# Altium PCB ArgoFCRev2.PcbDoc (part 5 of 6)
Units mm, origin at the board's own origin, x right, y up, seen from the top; angles counter-clockwise.
Board outline 140.21 x 119.63 mm, 4 copper layers (Top Layer, GND Plane, PWR Plane, Bottom Layer), stack 0.603 mm thick; 413 components, 223 nets, 1421 pads, 793 vias.
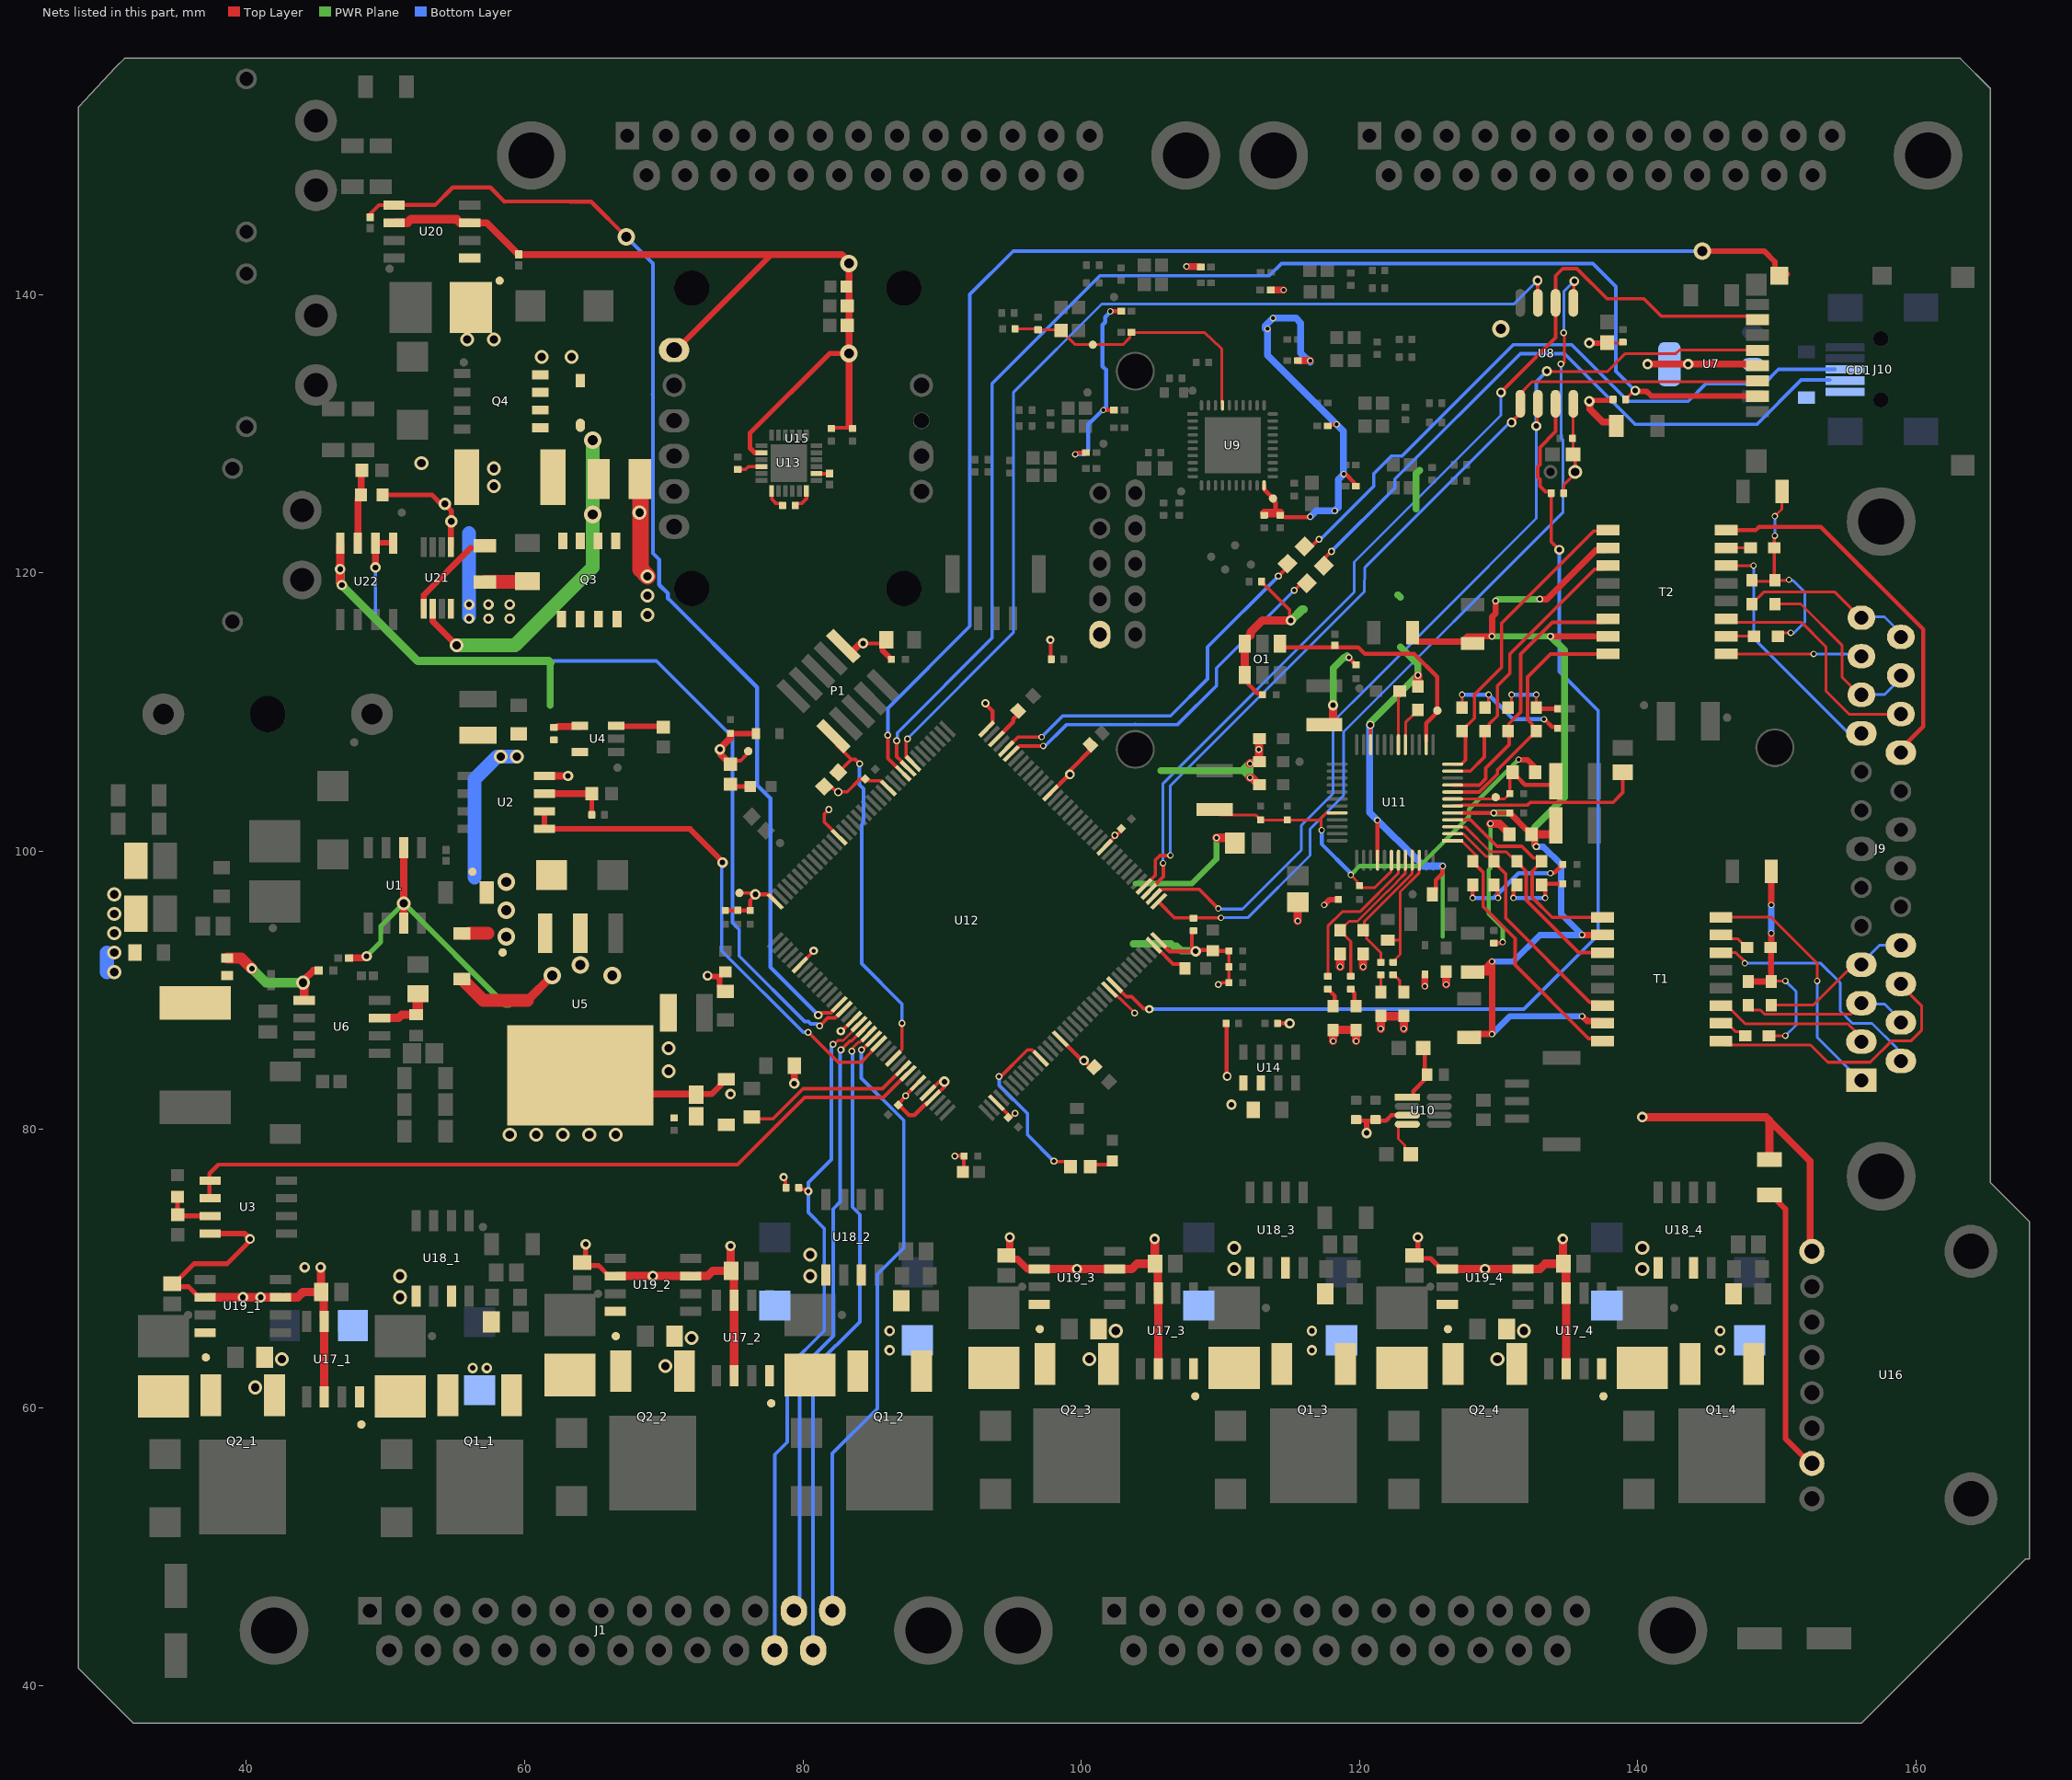
[diagram p6: the nets of this part, all layers, seen from the top]

## Via types
v1: diameter 0.5, hole 0.3, Top Layer to Bottom Layer, 278 vias
v2: diameter 0.45, hole 0.3, Top Layer to Bottom Layer, 146 vias
v3: diameter 0.75, hole 0.4, Top Layer to Bottom Layer, 103 vias
v4: diameter 1.27, hole 0.711, Top Layer to Bottom Layer, 101 vias
v5: diameter 1, hole 0.6, Top Layer to Bottom Layer, 86 vias
v6: diameter 0.6, hole 0.3, Top Layer to Bottom Layer, 31 vias
v7: diameter 0.7, hole 0.4, Top Layer to Bottom Layer, 19 vias
v8: diameter 0.6, hole 0.35, Top Layer to Bottom Layer, 8 vias
v9: diameter 0.9, hole 0.5, Top Layer to Bottom Layer, 7 vias
v10: diameter 0.6, hole 0.4, Top Layer to Bottom Layer, 4 vias
v11: diameter 3.3, hole 3.3, Top Layer to Bottom Layer, 4 vias
v12: diameter 0.65, hole 0.4, Top Layer to Bottom Layer, 2 vias
v13: diameter 0.75, hole 0.45, Top Layer to Bottom Layer, 1 vias
v14: diameter 1.2, hole 0.7, Top Layer to Bottom Layer, 1 vias
v15: diameter 1, hole 0.711, Top Layer to Bottom Layer, 1 vias
v16: diameter 3.2, hole 3.2, Top Layer to Bottom Layer, 1 vias

## Nets (pads, with @x,y where several pads share a name; then routed paths per layer and width w, separated by ;. In a path a pad name is that pad's centre, name@x,y a point inside that pad or via, vN(x,y) a via of type N, cw(c..) or ccw(c..) an arc to the next point about the centre after c; other vN are vias at no path point) (continued)
NetC68_1: C68.1 C69.1 R40.2 R46.2 TP19.1 U9.37 | length 20.1
  Top Layer w0.2: R46.2@95.261,137.541 96.832,137.541 C68.1@96.901,137.472 98.504,137.472 99.578,136.398 TP19.1@100.838,136.398 102.997,136.398 103.486,136.887 103.486,137.151 103.553,137.217 R40.2@103.703,137.217 ; R40.2@103.759,137.287 108.853,137.287 110.048,136.156 110.05,136.154 110.109,136.095 U9.37@110.109,132.207
NetC72_1: C72.1 R47.1 U10.1 | length 4.1
  Top Layer w0.2: U10.1@123.444,82.326 123.727,82.326 U10.1@123.874,82.473 ; R47.1@124.333,85.598 124.543,85.598 R47.1@124.714,85.427 ; C72.1@124.686,83.894 C72.1@124.841,84.048
  Top Layer w0.3: U10.1@123.874,82.473 123.874,82.756 124.686,83.568 C72.1@124.686,83.894 ; C72.1@124.714,84.201 R47.1@124.714,85.427
NetC76_1: C76.1 C77.2 FB2.1 TP20.1 U11.7 | length 8.7
  Top Layer w0.2: U11.7@126.96,103.755 129.54,103.755 130.175,103.755 130.433,103.755 C76.1@130.683,104.005 ; FB2.1@130.818,105.456 FB2.1@131.026,105.664
  Top Layer w0.25: C76.1@130.818,104.14 FB2.1@130.818,105.456
  Top Layer w0.3: FB2.1@131.026,105.664 131.026,105.614 131.326,105.314 131.376,105.314 131.915,104.775 C77.2@133.858,104.775
NetC81_1: C81.1 C82.1 C83.1 C84.1 FB2.2 U11.32 U11.42 | length 35.9
  Top Layer w0.2: C81.1@109.981,102.616 112.53,102.616 C82.1@112.903,102.243 ; C82.1@112.911,102.243 C84.1@114.808,102.243 ; C84.1@114.81,102.241 117.117,102.241 ; 117.234,102.108 117.234,102.3 ; v2(117.282,101.51) 117.234,101.558 117.234,102.124 117.117,102.241 ; U11.32@118.404,102.755 118.396,102.747 117.623,102.747 117.117,102.241 ; v2(119.38,98.298) 119.865,97.813 119.865,97.678 120.151,97.392 121.121,97.392 122.284,98.554 122.284,98.687 122.305,98.709 U11.42@122.305,99.354 ; FB2.2@132.334,105.918 FB2.2@132.442,105.918
  Top Layer w0.4: v2(131.445,106.589) 131.455,106.579 132.073,106.579 FB2.2@132.588,106.064
  PWR Plane w0.3: v2(117.282,101.51) v2@117.322,101.51 ; v2@119.351,98.327 v2(119.38,98.298) ; v2@119.444,98.361 120.015,98.933 124.333,98.933 127.875,102.475 127.875,103.019 v2(131.445,106.589)
  Bottom Layer w0.3: v2(117.282,101.51) 117.282,100.523 119.351,98.454 119.351,98.367 119.429,98.29 v2@119.449,98.29 ; v2(119.38,98.298) v2@119.444,98.361
NetC91_1: C91.1 R55.2 R58.2 | length 5.6
  Top Layer w0.2: R58.2@131.07,97.327 R58.2@131.318,97.575 ; R55.2@132.969,97.282 133.293,97.282 R55.2@133.35,97.225
  Top Layer w0.3: v2(131.07,96.647) R58.2@131.07,97.327 ; R55.2@133.223,97.663 C91.1@134.493,97.663 ; v2(133.35,96.647) R55.2@133.35,97.225
  Bottom Layer w0.3: v2(131.07,96.647) v2(133.35,96.647)
NetC92_1: C92.1 R56.2 R57.2 | length 9.6
  Top Layer w0.3: v2(128.143,96.647) R57.2@128.143,97.575 ; R56.2@129.667,97.409 129.783,97.409 129.917,97.275 129.917,96.734 129.963,96.688 v2(129.963,96.647) ; v2(133.731,98.425) 133.76,98.454 134.022,98.454 134.62,99.052 C92.1@134.62,99.06
  Bottom Layer w0.3: v2(128.143,96.647) 129.667,96.647 v2@129.828,96.808 ; v2(129.963,96.647) 129.963,96.672 v2@129.828,96.808 ; v2(133.731,98.425) 131.445,98.425 v2@129.828,96.808
NetC94_1: C94.1 R63.2 R66.2 R67.2 R68.2 | length 15.6
  Top Layer w0.2: R63.2@149.606,86.741 v2(150.622,86.741) ; R68.2@149.606,90.678 v2(150.622,90.678)
  Top Layer w0.45: R67.2@148.082,90.678 148.121,90.639 R68.2@149.606,90.639 ; R66.2@149.567,93.091 149.587,93.072 149.587,90.824 R68.2@149.606,90.805 ; R66.2@149.606,93.091 v2(149.606,94.107) ; v2(149.606,96.139) C94.1@149.606,98.298
  Bottom Layer w0.2: v2(150.622,86.741) 151.384,87.503 151.384,89.916 v2(150.622,90.678)
  Bottom Layer w0.45: v2(149.606,94.107) v2(149.606,96.139)
NetC95_1: C95.1 R71.2 R72.2 | length 9.4
  Top Layer w0.2: R71.2@127.381,110.324 v2(127.381,111.252) ; R72.2@129.286,110.617 v2(129.286,111.252)
  Top Layer w0.3: v2(133.271,109.479) 133.312,109.479 133.852,108.939 134.147,108.939 C95.1@134.247,108.839
  Bottom Layer w0.3: v2(127.381,111.252) v2(129.286,111.252) 131.059,109.479 v2(133.271,109.479)
NetC96_1: C96.1 R69.2 R70.2 | length 4.9
  Top Layer w0.2: R69.2@130.683,110.324 130.937,110.578 v2(130.937,111.252) ; R70.2@132.715,110.617 v2(132.715,111.252) ; R70.2@132.842,110.324 R70.2@132.93,110.236
  Top Layer w0.3: R70.2@132.93,110.236 C96.1@134.239,110.236
  Bottom Layer w0.3: v2(130.937,111.252) v2(132.715,111.252)
NetC97_1: C97.1 R78.2 R79.2 R80.2 R82.2 | length 14.7
  Top Layer w0.2: R82.2@148.209,119.468 148.297,119.38 R80.2@149.86,119.38 ; R80.2@149.86,119.468 150.837,119.468 v2(150.876,119.507) ; R80.2@149.86,119.634 149.821,119.673 149.821,122.626 v2(149.86,122.665) ; v2(149.86,124.079) 150.368,124.587 C97.1@150.368,125.653 ; R78.2@150.368,115.697 v2(151.003,115.697)
  Bottom Layer w0.2: v2(149.86,122.665) v2(149.86,124.079) ; v2(150.876,119.507) 150.92,119.463 151.174,119.463 152.019,118.618 152.019,116.459 151.213,115.653 151.047,115.653 v2(151.003,115.697)
NetC99_1: C99.1 O1.4 TP24.1 U11.14 | length 17.1
  Top Layer w0.3: O1.4@114.3,114.663 118.237,114.663 119.906,114.663 120.396,114.173 123.952,114.173 125.603,112.522 TP24.1@125.603,110.109 125.603,109.982 124.805,109.184 U11.14@124.805,107.91
NetC117_1: C117.1 U13.10 | length 1.8
  Top Layer w0.254: C117.1@75.311,127.439 75.877,127.439 76.077,127.639 U13.10@77.019,127.639
NetC118_1: C118.1 U12.71 | length 2.7
  Top Layer w0.254: U12.71@105.537,92.964 106.611,91.89 107.181,91.89 107.569,91.502 C118.1@107.569,91.44
NetC119_1: C119.1 U13.18 | length 1.3
  Top Layer w0.254: C119.1@79.444,124.841 79.444,124.866 79.567,124.989 79.904,124.989 80.264,125.349 U13.18@80.264,125.603
NetC119_2: C119.2 U13.13 | length 1.3
  Top Layer w0.254: U13.13@77.763,125.603 77.763,125.31 78.084,124.989 78.421,124.989 78.486,124.924 C119.2@78.486,124.841
NetC120_1: C120.1 U12.106 | length 2.7
  Top Layer w0.3: U12.106@93.913,108.073 95.123,109.283 95.123,109.492 95.482,109.85 C120.1@95.482,110.087
NetC121_2: C121.2 U13.20 | length 0.8
  Top Layer w0.254: U13.20@81.153,127.127 C121.2@81.915,127.127
NetC131_2: C131.2 U12.14 U20.5 | length 84.4
  Top Layer w0.25: v8(81.103,88.224) 81.197,88.224 81.366,88.392
  Top Layer w0.254: C131.2@48.895,145.551 C131.2@48.895,145.796
  Top Layer w0.28: C131.2@48.895,145.796 49.53,146.431 U20.5@50.628,146.431 ; 58.547,146.685 63.273,146.685 ; 81.366,88.392 82.01,88.392 U12.14@82.616,88.998
  Top Layer w0.3: U20.5@50.628,146.431 53.556,146.431 54.826,147.701 57.531,147.701 58.547,146.685 ; 63.273,146.685 64.77,146.685 v4(67.31,144.145)
  Bottom Layer w0.28: v4(67.31,144.145) 69.215,142.24 69.215,132.842 69.215,121.412 69.674,120.953 69.674,119.143
  Bottom Layer w0.3: 69.674,119.143 70.309,118.508 70.309,118.168 76.708,111.769 76.708,104.749 77.662,103.795 77.662,91.664 v8(81.103,88.224)
NetC133_1: C133.1 R108.1 | length 3
  Top Layer w1: R108.1@57.15,119.349 C133.1@60.146,119.349
NetD9_2: D9.2 R85.1 | length 1.4
  Top Layer w0.35: R85.1@74.549,104.648 D9.2@75.946,104.648
NetD10_2: D10.2 R93.2 | length 1.4
  Top Layer w0.254: R93.2@100.965,77.47 D10.2@102.362,77.47
NetD13_1: D13.1 Q4.4 R107.1 R108.2 U21.1 | length 5.8
  Top Layer w0.45: U21.1@52.746,117.422 52.746,118.405 56.134,121.793
  other v5: 57.785,126.238 57.785,127.508 61.214,135.509 63.373,135.509
NetD13_1_1: D13_1.1 Q1_1.1 R103_1.2 U18_1.7
  other v3: 56.261,62.865 57.277,62.865
NetD13_2: D13.2 Q3.1 Q3.2 Q3.3 Q4.1 Q4.2 Q4.3 R106.2 TP29.1 U21.2 | length 24.4
  Top Layer w0.45: U21.2@53.396,117.422 53.396,116.53 v5(55.118,114.808)
  PWR Plane w1: v5(55.118,114.808) 59.309,114.808 64.897,120.396 v4(64.897,124.206) v4@64.897,129.413
  other v4: 64.897,129.54
NetD13_2_1: D13_2.1 Q1_2.1 R103_2.2 U18_2.7
  other v3: 86.233,64.135 86.233,65.532
NetD13_3_1: D13_3.1 Q1_3.1 R103_3.2 U18_3.7
  other v3: 116.586,64.135 116.586,65.532
NetD13_4_1: D13_4.1 Q1_4.1 R103_4.2 U18_4.7
  other v3: 145.923,64.135 145.923,65.532
NetD14_1_1: D14_1.1 Q2_1.1 R105_1.2 U18_1.5
  other v5: 40.64,61.468 42.545,63.5 51.054,67.945 51.054,69.469
NetD14_2_1: D14_2.1 Q2_2.1 R105_2.2 U18_2.5
  other v5: 70.104,62.992 72.009,65.024 80.518,69.469 80.518,70.993
NetD14_3_1: D14_3.1 Q2_3.1 R105_3.2 U18_3.5
  other v5: 100.584,63.5 102.489,65.532 110.998,69.977 110.998,71.501
NetD14_4_1: D14_4.1 Q2_4.1 R105_4.2 U18_4.5
  other v5: 129.921,63.5 131.826,65.532 140.335,69.977 140.335,71.501
NetENC1_RST: 
NetJ9_1: J9.1 T1.16 | length 18.1
  Top Layer w0.2: T1.16@145.987,95.25 149.606,95.25 152.908,91.948 v2(152.908,90.678)
  Bottom Layer w0.2: v2(152.908,90.678) 152.908,86.614 J9.1@156.083,83.439
NetJ9_2: J9.2 T1.11 | length 11.4
  Top Layer w0.2: T1.11@145.987,88.9 146.432,88.9 147.743,87.589 155.108,87.589 J9.2@156.341,86.356
NetJ9_3: J9.3 J9.15 R67.1 | length 12.7
  Top Layer w0.2: R67.1@147.955,88.939 147.955,88.889 148.255,88.589 148.823,88.589 149.123,88.289 155.345,88.289 J9.3@156.45,89.394
  Bottom Layer w0.2: J9.3@156.083,89.027 157.734,89.027 J9.15@159.004,87.757
NetJ9_4: J9.4 J9.17 R68.1 | length 10.7
  Top Layer w0.2: R68.1@149.606,88.939 152.61,88.939 J9.4@155.521,91.85
  Bottom Layer w0.2: J9.4@155.92,91.785 157.37,93.235 J9.17@158.877,93.235
NetJ9_10: J9.10 T2.14 | length 17.8
  Top Layer w0.2: T2.14@146.368,120.523 v2(148.336,120.523)
  Bottom Layer w0.2: v2(148.336,120.523) 148.336,115.316 155.147,108.505 156.045,108.505 J9.10@156.08,108.47
NetJ9_11: J9.11 J9.24 R80.1 | length 14.2
  Top Layer w0.2: R80.1@149.86,117.768 151.726,117.768 154.686,114.808 154.686,112.522 J9.11@155.956,111.252
  Bottom Layer w0.2: J9.11@155.833,111.252 157.734,111.252 J9.24@159.281,112.799
NetJ9_12: J9.12 T2.9 | length 9.7
  Top Layer w0.2: T2.9@146.368,114.173 v2(152.654,114.173)
  Bottom Layer w0.2: v2(152.654,114.173) J9.12@156.083,114.173
NetJ9_13: J9.13 J9.25 R82.1 | length 13.6
  Top Layer w0.2: R82.1@148.209,117.768 149.059,118.618 154.178,118.618 J9.13@156.191,116.605
  Bottom Layer w0.2: J9.13@155.581,116.84 157.734,116.84 J9.25@159.348,115.226
NetJ9_14: J9.14 T1.14 | length 17.8
  Top Layer w0.2: T1.14@145.987,92.71 147.066,92.71 147.701,92.075 v2(147.701,91.948)
  Bottom Layer w0.2: v2(147.701,91.948) 153.162,91.948 154.559,90.551 154.559,88.519 155.448,87.63 156.845,87.63 158.623,85.852 158.623,85.222 J9.14@158.92,84.925
NetJ9_16: J9.16 T1.9 | length 19.9
  Top Layer w0.2: T1.9@145.987,86.36 146.267,86.08 152.429,86.08 153.673,84.836 156.718,84.836 158.242,86.36 159.639,86.36 160.401,87.122 160.401,88.9 J9.16@158.877,90.424
NetJ9_22: J9.22 T2.16 | length 27.2
  Top Layer w0.3: T2.16@146.368,123.063 148.482,123.063 148.736,123.317 153.162,123.317 160.528,115.951 160.528,108.966 159.131,107.569 J9.22@159.131,106.68
NetJ9_23: J9.23 T2.11 | length 17.2
  Top Layer w0.2: T2.11@146.368,116.713 146.622,116.459 151.765,116.459 153.543,114.681 153.543,111.506 155.194,109.855 J9.23@158.877,109.855
NetJ10_2: J10.2 R95.1 | length 46.9
  Top Layer w0.254: R95.1@116.967,120.523 v1(117.983,121.539)
  Bottom Layer w0.254: v1(117.983,121.539) 122.555,126.111 122.555,126.746 131.572,135.763 134.747,135.763 139.827,130.683 148.59,130.683 151.765,133.858 J10.2@153.797,133.858
NetJ10_3: J10.3 R96.1 | length 47.5
  Top Layer w0.254: R96.1@116.078,121.412 v1(117.094,122.428)
  Bottom Layer w0.254: v1(117.094,122.428) 117.161,122.428 117.284,122.551 117.344,122.551 121.031,126.238 121.031,127.127 122.301,128.397 123.063,128.397 131.064,136.398 135.255,136.398 139.319,132.334 143.637,132.334 144.907,133.604 149.098,133.604 150.114,134.62 J10.3@154.178,134.62
NetLED1_1: LED1.1 R74.2 U11.44 | length 11
  Top Layer w0.2: R74.2@118.618,94.272 119.38,93.51 LED1.1@119.38,91.059 ; R74.2@118.618,94.322 118.618,94.372 118.918,94.672 118.968,94.672 119.268,94.972 119.864,94.972 122.009,97.117 122.036,97.117 122.695,97.776 122.695,97.803 123.305,98.413 U11.44@123.305,99.354
  Top Layer w0.3: LED1.1@119.38,90.985 LED1.1@119.458,90.985
NetLED1_2: LED1.2 R77.2 | length 1.4
  Top Layer w0.3: LED1.2@119.38,90.096 119.405,90.096 119.505,89.996 119.505,89.949 119.634,89.82 R77.2@119.634,88.806
NetLED2_1: LED2.1 U11.43 | length 11.2
  Top Layer w0.2: LED2.1@117.729,91.006 117.729,94.615 118.766,95.652 120.036,95.652 122.805,98.421 U11.43@122.805,99.354
NetLED2_2: LED2.2 R81.2 | length 1.4
  Top Layer w0.3: LED2.2@117.729,90.096 117.754,90.096 117.854,89.996 117.854,89.971 118.237,89.588 R81.2@118.237,88.9
NetLED3_1: LED3.1 R75.2 U11.46 | length 8.9
  Top Layer w0.2: R75.2@122.047,93.611 122.924,93.611 ; LED3.1@122.428,92.075 122.506,92.075 122.603,92.172 122.603,92.25 122.936,92.583 122.936,93.611 122.936,97.08 124.276,98.42 U11.46@124.276,99.325
NetLED3_2: LED3.2 R83.2 | length 1.3
  Top Layer w0.2: LED3.2@122.428,91.186 122.428,91.137 122.603,90.962 122.652,90.962 122.89,90.724 122.89,90.216 R83.2@122.936,90.17
NetLED4_1: LED4.1 R76.2 U11.45 | length 9.3
  Top Layer w0.2: LED4.1@121.539,92.075 121.539,92.71 120.535,93.714 120.535,94.056 R76.2@120.269,94.322 120.355,94.408 120.355,94.955 123.805,98.405 U11.45@123.805,99.354
NetLED4_2: LED4.2 R84.2 | length 1.1
  Top Layer w0.2: R84.2@121.539,90.043 LED4.2@121.539,91.112
NetQ3_4: Q3.4 R107.2
NetQ3_5: Q3.5 Q3.6 Q3.7 Q3.8 R106.1 R109.1 R110.2 TP28.1 U20.1 U21.4 U21.5 | length 20.9
  Top Layer w0.35: R110.2@49.911,125.603 53.34,125.603 v9@53.986,124.957 ; v9(54.278,124.968) 54.278,124.919 54.737,124.46 v9(54.737,123.698)
  Top Layer w0.45: U21.5@54.696,121.846 54.696,123.657 v9(54.737,123.698)
  Top Layer w1.2: R106.1@68.278,126.746 68.326,126.698 68.326,120.269 v5(68.834,119.761)
  Bottom Layer w1: v3@56.007,116.84 v3(56.007,117.729) 56.007,122.858
  other v3: 56.007,116.713 57.404,116.713 58.928,116.713 57.404,117.729 58.928,117.729
  other v5: 68.834,116.967 68.834,118.364 68.25,124.333 52.578,127.889 55.88,136.779 57.785,136.779
NetR2_1: R2.1 R5.2 U3.3 | length 2.5
  Top Layer w0.35: R5.2@35.052,73.914 R2.1@35.052,75.057 ; R5.2@35.433,73.787 U3.3@36.83,73.787
NetR3_1: R3.1 R4.2 U2.3 | length 4.5
  Top Layer w0.35: R4.2@64.828,102.87 R3.1@64.828,104.129
  Top Layer w0.5: U2.3@61.414,104.14 R3.1@64.624,104.14
NetR7_2: R7.2 U4.3 | length 3.3
  Top Layer w0.4: U4.3@66.77,108.966 69.85,108.966 R7.2@69.997,108.819
NetR8_1: R8.1 U4.4 | length 2
  Top Layer w0.5: R8.1@62.128,108.908 62.299,108.908 62.357,108.966 63.371,108.966 63.382,108.977 U4.4@64.064,108.977
NetR9_1: R9.1 R12.2 U6.3 | length 4
  Top Layer w0.6: U6.3@49.657,88.011 50.927,88.011 51.169,88.253 R9.1@52.197,88.253
  Top Layer w0.75: R9.1@52.324,88.371 R12.2@52.324,89.754
NetR10_1: R10.1 R13.2 U6.5 | length 9
  Top Layer w0.5: v5@44.069,90.678 44.831,91.44 R13.2@45.085,91.44
  Top Layer w0.6: U6.5@44.151,89.281 v5@44.151,90.758
  Top Layer w0.8: R10.1@38.608,92.323 39.63,92.323 v3(40.386,91.567)
  PWR Plane w0.7: v3(40.386,91.567) 41.402,90.551 v5(44.069,90.551)
NetR48_2: R48.2 U10.4 | length 3.3
  Top Layer w0.2: U10.4@123.444,80.376 122.93,80.376 122.794,80.24 122.794,79.325 123.257,78.862 123.257,78.638 123.663,78.232 R48.2@123.887,78.232
NetR54_1: R54.1 U11.6 | length 13.6
  Top Layer w0.25: U11.6@126.706,103.255 126.71,103.259 127.336,103.259 127.395,103.318 132.09,103.318 132.276,103.504 138.232,103.504 138.938,104.21 R54.1@138.938,105.156
NetR61_2: R61.2 U11.18 | length 3.6
  Top Layer w0.2: U11.18@122.805,107.656 R61.2@122.805,111.299
NetR62_2: R62.2 U11.17 | length 1.7
  Top Layer w0.2: U11.17@123.317,108.331 123.317,109.259 R62.2@123.856,109.798
NetR63_1: R63.1 T1.10 | length 2
  Top Layer w0.2: T1.10@145.987,87.63 146.432,87.63 147.021,87.041 147.528,87.041 R63.1@147.701,86.868
NetR66_1: R66.1 T1.15 | length 1.8
  Top Layer w0.2: T1.15@146.558,93.98 146.558,93.854 146.712,93.7 147.208,93.7 147.817,93.091 R66.1@147.867,93.091
NetR78_1: R78.1 T2.10 | length 1.6
  Top Layer w0.2: T2.10@146.812,115.443 R78.1@148.375,115.443
NetR79_1: R79.1 T2.15 | length 1.7
  Top Layer w0.2: T2.15@146.368,121.793 R79.1@148.082,121.793
NetR93_1: R93.1 U12.48 | length 13
  Top Layer w0.254: v1@94.107,83.693 96.139,85.725 96.446,85.725 97.062,85.109 U12.48@97.095,85.109 ; v1(98.044,77.724) 98.071,77.697 98.893,77.697 99.06,77.53 R93.1@99.06,77.47
  Bottom Layer w0.254: v1(94.107,83.82) 94.107,83.185 96.139,81.153 96.139,79.629 v1(98.044,77.724)
NetR101_2: R101.2 U16.7 | length 20.3
  Top Layer w0.4: R101.2@149.987,75.311 149.987,74.93 150.622,74.295 150.622,57.785 U16.7@152.4,56.007
NetR110_1: R110.1 R111.2 U22.3 | length 5.4
  Top Layer w0.254: R111.2@48.245,127.32 R111.2@48.307,127.381
  Top Layer w0.5: U22.3@48.006,122.12 48.006,125.337 48.245,125.576 R111.2@48.245,127.32
NetU12_15: U12.15 U22.1 U22.2 | length 61.4
  Top Layer w0.254: v1@81.153,87.503 81.269,87.503 81.781,88.015 82.3,88.015 U12.15@83.058,88.773
  Top Layer w0.4: U22.2@49.276,122.174 U22.1@50.419,122.174
  Top Layer w0.5: v3@49.276,120.523 U22.2@49.276,121.793
  Bottom Layer w0.254: v3(49.276,120.396) 49.276,116.84 52.451,113.665 69.469,113.665 72.644,110.49 74.93,108.204 74.93,94.869 75.422,94.377 75.422,92.472 80.137,87.757 80.391,87.757 80.551,87.597 80.98,87.597 81.125,87.451 v1(81.192,87.451)
NRST: P1.10 R87.2 U12.25 | length 26.3
  Top Layer w0.254: P1.10@82.447,107.636 83.484,106.598 ; R87.2@82.548,105.662 83.484,106.598 ; v1(84.074,106.299) 83.775,106.598 83.484,106.598 ; U12.25@86.505,85.109 86.505,85.142 87.122,85.758 v1@87.122,87.612
  Bottom Layer w0.254: v1(84.074,106.299) 84.074,104.775 84.37,104.479 84.37,102.06 84.233,101.923 84.233,91.916 87.122,89.027 v1(87.122,87.63)
REG_SUPPLY_5V: C9.1 C12.1 C18.1 C19.1 C20.2 C21.1 D3.1 D4.2 L1.2 R8.2 R10.2 TP3.1 TP7.1 U4.5 U5.3 | length 14.1
  Top Layer w0.9: D4.2@55.499,94.101 55.936,94.101 55.942,94.107 57.377,94.107
  Bottom Layer w1: 29.972,91.313 29.972,92.71 ; 56.388,98.12 56.388,105.176 58.019,106.807 v5(59.436,106.807)
  other v4: 58.674,93.853 58.674,95.758 58.674,97.79
  other v5: 30.5,91.313 30.5,92.71 30.5,94.107 30.5,95.504 30.5,96.901 58.293,106.807
RXM1: R57.1 T1.8 U11.1 | length 19.3
  Top Layer w0.2: U11.1@126.706,100.755 127.34,100.755 128.397,99.698 R57.1@128.397,99.695 ; T1.8@137.294,86.543 T1.8@137.477,86.36
  Top Layer w0.25: R57.1@128.143,99.225 128.905,98.463 128.905,96.012 131.191,93.726 131.191,91.821 136.469,86.543 T1.8@137.294,86.543
RXM2: R70.1 T2.8 U11.8 | length 18.6
  Top Layer w0.2: R70.1@132.365,108.274 132.415,108.274 132.715,108.574 R70.1@132.715,108.624
  Top Layer w0.25: U11.8@126.706,104.255 128.626,104.255 129.922,105.551 129.922,105.843 132.352,108.274 R70.1@132.365,108.274 ; R70.1@132.715,108.624 132.44,108.899 132.44,109.114 132.08,109.474 132.08,112.522 133.731,114.173 T2.8@137.858,114.173
RXP1: R56.1 T1.6 U11.2 | length 17.3
  Top Layer w0.2: U11.2@126.714,101.247 127.48,101.247 129.102,99.625 R56.1@129.367,99.625
  Top Layer w0.25: R56.1@129.667,99.225 130.513,98.379 130.513,97.082 130.513,95.195 136.553,89.155 137.222,89.155 T1.6@137.477,88.9
  Top Layer w0.3: R56.1@129.667,99.225 R56.1@129.667,99.275
RXP2: R69.1 T2.6 U11.9 | length 19.7
  Top Layer w0.2: R69.1@130.683,108.624 R69.1@130.749,108.69
  Top Layer w0.25: U11.9@126.706,104.755 128.631,104.755 129.088,105.212 129.088,105.974 130.764,107.65 R69.1@130.764,108.412 ; R69.1@130.749,108.69 130.749,109.159 131.589,109.999 131.589,114.177 133.871,116.459 137.604,116.459 T2.6@137.858,116.713
SD_CS0_3.3V: R89.1 U8.1 U12.73 | length 63.6
  Top Layer w0.2: v1@134.62,135.001 134.747,135.128 v1@134.747,137.287
  Top Layer w0.254: U12.73@105.58,96.406 105.58,96.373 105.568,96.362 106.714,95.216 v2(110.052,95.216) ; U8.1@135.382,139.954 135.411,139.983 135.411,140.932 v7(135.449,140.97)
  Bottom Layer w0.2: v2(110.052,95.216) 111.98,95.216 116.459,99.695 116.459,101.6 118.872,104.013 118.872,108.585 134.62,124.333 134.62,129.563 134.493,129.69 v1(134.493,135.001) ; v1(134.689,137.26) 134.689,140.21 v7(135.449,140.97)
SD_CS1_3.3V: CD1.2 R90.2 U12.117 | length 97.6
  Top Layer w0.254: v1(86.741,107.95) 86.741,106.807 U12.117@87.122,106.426 ; R90.2@139.109,132.461 139.744,133.096 v7(139.827,133.096)
  Top Layer w0.4: v7(139.827,133.096) 139.884,133.039 140.653,133.039 140.977,132.715 CD1.2@148.971,132.715
  Bottom Layer w0.254: v1(86.741,107.95) 86.788,107.997 86.788,108.505 93.599,115.316 93.599,133.604 101.346,141.351 113.519,141.351 114.408,142.24 136.779,142.24 138.43,140.589 138.43,134.493 v7(139.827,133.096)
SD_DET_3.3V: CD1.9 U12.118 | length 97.7
  Top Layer w0.254: v1(86.106,108.331) 86.108,108.329 86.108,106.678 U12.118@86.741,106.045
  Top Layer w0.4: v4(144.653,143.129) 149.098,143.129 149.868,142.359 149.868,141.793 149.964,141.697 150.53,141.697 CD1.9@150.749,141.478
  Bottom Layer w0.254: v1(86.106,108.331) 86.106,110.273 92.006,116.173 92.006,140.012 95.123,143.129 v4(144.653,143.129)
SD_Hold: R14.2 U8.7 U12.63 | length 77.6
  Top Layer w0.2: U8.7@134.103,132.157 U8.7@134.199,132.253
  Top Layer w0.254: U12.63@102.743,90.043 103.251,89.535 103.632,89.535 104.484,88.683 104.865,88.683 v6(104.902,88.646) ; U8.7@134.107,131.694 134.107,130.16 132.969,129.021 132.969,127.775 132.824,127.63 132.824,126.878 132.969,126.733 132.969,126.238 133.373,125.834 133.685,125.834 133.829,125.69 133.829,125.622 133.789,125.582 133.789,122.243 v7(134.366,121.666)
  Bottom Layer w0.254: v6(104.902,88.646) 131.826,88.646 137.16,93.98 137.16,110.109 134.366,112.903 v7(134.366,121.666)
SD_MISO_3.3V: CD1.7 U8.2 U12.75 | length 71.8
  Top Layer w0.254: U12.75@105.283,97.536 105.911,98.164 105.911,99.113 v2(105.886,99.137) ; v7(130.175,132.969) 134.112,136.906 U8.2@134.112,139.319 ; U8.2@134.112,139.573 134.112,141.351 134.62,141.859 135.636,141.859 137.795,139.7 140.462,139.7 141.715,138.447 CD1.7@148.717,138.447
  Bottom Layer w0.2: v2(105.886,99.137) 105.886,104.87 119.634,118.618 119.634,120.777 130.175,131.318 v7(130.175,132.969)
SD_MOSI_3.3V: CD1.3 U8.5 U12.76 | length 64.2
  Top Layer w0.2: U8.5@131.572,132.207 131.572,132.894 132.424,133.746 148.321,133.746 CD1.3@148.336,133.731
  Top Layer w0.254: U12.76@104.519,97.466 105.334,98.281 105.334,99.365 105.664,99.695 v2(106.411,99.695) ; v7(130.937,130.81) 130.937,130.846 131.563,131.472 U8.5@131.563,132.157
  Bottom Layer w0.2: v2(106.411,99.695) 106.411,104.703 120.281,118.573 120.338,118.629 120.34,118.709 120.383,120.306 120.385,120.385 120.442,120.442 130.81,130.81 v7(130.937,130.81)
SD_SCLK_3.3V: CD1.5 U8.6 U12.74 | length 72.9
  Top Layer w0.2: v7@132.715,130.429 132.774,130.488 132.774,132.012 U8.6@132.842,132.08 ; v3(133.477,134.493) 133.519,134.451 137.805,134.451 139.117,135.763 142.753,135.763 143.007,136.017 CD1.5@149.098,136.017
  Top Layer w0.254: U12.74@105.227,96.759 105.259,96.759 105.76,97.26 108.48,97.26 v2(109.855,95.885)
  Bottom Layer w0.2: v2(109.855,95.885) 109.899,95.841 111.589,95.841 115.824,100.076 115.824,101.854 118.11,104.14 118.11,109.308 120.696,111.894 120.701,111.894 125.887,117.08 125.887,117.085 132.715,123.913 v7(132.715,130.556)
  Bottom Layer w0.254: v7(132.715,130.556) 132.715,133.731 v3(133.477,134.493)
SDCIO: U8.3 U12.116 | length 72.5
  Top Layer w0.254: v1(87.503,108.077) 87.503,108.01 87.418,107.926 87.418,106.765 U12.116@87.63,106.553 ; v7(132.805,141.007) 132.819,140.993 132.819,139.215 U8.3@132.842,139.192
  Bottom Layer w0.2: v1(87.503,108.077) 95.123,115.697 95.123,132.965 101.477,139.319 131.118,139.319 v7(132.805,141.007)
SPI3_MISO_3.3V: J1.25 U12.20 | length 45.9
  Top Layer w0.2: v1(83.507,85.632) 83.565,85.689 83.565,85.866 83.973,86.275 84.093,86.275 84.305,86.487 U12.20@84.328,86.487
  Bottom Layer w0.254: J1.25@80.735,42.58 80.735,62.828 84.093,66.186 84.093,73.895 83.566,74.422 v1@83.566,85.598
SPI3_MOSI_3.3V: J1.13 U12.21 | length 45.4
  Top Layer w0.254: v1(84.201,85.725) 84.26,85.725 85.474,86.939 U12.21@85.506,86.939
  Bottom Layer w0.254: J1.13@82.12,45.42 82.12,56.72 85.344,59.944 85.344,69.596 87.249,71.501 87.249,80.645 84.201,83.693 v1@84.201,85.598
SPI3_SCLK_3.3V: J1.12 U12.19 | length 44.5
  Top Layer w0.254: v1(82.739,85.725) 83.374,86.36 83.481,86.36 84.351,87.23 U12.19@84.384,87.23 U12.19@84.799,87.646
  Bottom Layer w0.254: J1.12@79.35,45.42 79.35,46.015 79.756,46.421 79.756,62.738 82.169,65.151 82.169,74.295 82.677,74.803 v1@82.677,85.725
SPI_CS1_3.3V: J1.24 R94.2 U12.18 | length 49.5
  Top Layer w0.2: v1(82.157,86.114) 82.238,86.114 82.526,86.402 82.902,86.402 84.03,87.53 U12.18@84.03,87.551
  Top Layer w0.254: R94.2@79.629,75.692 v6@80.264,75.692 ; U12.18@84.03,87.551 U12.18@84.03,87.584 U12.18@84.446,87.999
  Bottom Layer w0.254: J1.24@77.978,42.799 77.978,56.642 78.867,57.531 78.867,62.865 81.534,65.532 81.534,72.898 80.391,74.041 v6(80.391,75.565) 80.391,76.2 82.042,77.851 v1@82.042,85.979
STM32VDD: Boot2.1 C2.1 C10.1 C11.1 C25.2 C27.1 C28.1 C29.1 C30.1 C31.1 C32.1 C40.1 C41.1 C70.1 C71.1 C85.2 C86.1 C87.1 C98.1 C100.1 C101.1 C102.1 C103.1 C104.1 C105.1 C106.1 C107.1 C108.1 C109.1 C110.1 C111.1 C112.1 C113.1 C114.1 C115.1 C116.1 C122.2 C123.2 C124.2 C125.2 C126.1 C129_1.2 C129_2.2 C129_3.2 C129_4.2 C130_1.2 C130_2.2 C130_3.2 C130_4.2 C132.1 CD1.4 D2.2 D4.1 D5.1 D8.2 FB1.1 O1.1 O1.6 P1.1 pad.7 pad.VCC R14.1 R20.2 R21.2 R22.2 R23.2 R24.2 R25.2 R26.2 R27.2 R51.1 R52.1 R53.2 R59.2 R60.2 R62.1 R64.1 R73.1 R74.1 R76.1 R77.1 R81.1 R83.1 R84.1 R85.2 R86.2 R87.1 R88.2 R89.2 R90.1 R91.1 R94.1 R97.2 R98.2 R99.2 R100.2 R101.1 RT1.2 TP5.1 TP16.1 U1.3 U1.6 U2.4 U3.4 U5.2 U5.4 U7.2 U7.4 U8.8 U9.20 U10.3 U11.22 U11.40 U12.6 U12.17 U12.30 U12.32 U12.33 U12.39 U12.52 U12.62 U12.72 U12.84 U12.95 U12.108 U12.121 U12.131 U12.144 U13.8 U14.1 U14.2 U15.1 U16.1 U17_1.3 U17_1.6 U17_2.3 U17_2.6 U17_3.3 U17_3.6 U17_4.3 U17_4.6 U19_1.3 U19_1.6 U19_2.3 U19_2.6 U19_3.3 U19_3.6 U19_4.3 U19_4.6 U20.3 U20.6 U22.4 | length 508.7
  Top Layer w0.2: U12.62@102.077,90.059 102.115,90.059 102.713,89.461 102.762,89.461 v1(103.856,88.367) ; v3(120.523,79.756) v3@120.523,79.99 ; R62.1@124.201,111.853 R62.1@124.206,111.848 ; R14.1@134.689,125.73 134.689,126.307 pad.7@135.636,127.254 ; C30.1@135.255,128.524 135.373,128.642 U8.8@135.373,132.157 ; C30.1@135.358,128.397 C30.1@135.382,128.373 ; C32.1@137.783,136.525 C31.1@139.005,136.525 ; v3@140.658,135.001 v3@140.658,135.275
  Top Layer w0.24: v10(120.777,109.093) 120.805,109.065 U11.22@120.805,107.656
  Top Layer w0.254: U5.4@64.008,83.907 U5.4@64.175,84.074 ; D2.2@74.295,83.693 74.395,83.693 D2.2@74.803,83.285 ; C111.1@74.422,95.758 C111.1@74.426,95.754 ; R85.2@74.803,106.252 75.055,106.504 75.516,106.504 76.007,106.995 76.007,107.028 76.04,107.061 TP5.1@76.073,107.061 ; C110.1@75.307,95.754 C110.1@75.311,95.758 C110.1@75.315,95.754 ; Boot2.1@75.482,96.996 76.486,96.996 v3(76.581,96.901) ; C103.1@76.196,95.754 C103.1@76.2,95.758 ; R94.1@78.74,75.819 v6@78.74,76.454 ; U12.6@79.788,91.827 79.788,91.84 80.772,92.824 v6(80.772,92.837) ; R87.1@81.536,104.65 82.018,104.65 82.335,104.333 82.484,104.333 v10(82.55,104.267) 83.185,104.267 84.101,105.183 C104.1@84.482,105.183 ; v1(81.874,102.997) 81.534,102.657 81.534,102.108 U12.131@82.423,101.219 ; R98.2@81.915,130.429 R97.2@83.439,130.429 ; v6(82.725,87.074) 82.781,87.074 83.644,87.937 U12.17@83.677,87.937 ; C104.1@84.328,105.156 C104.1@84.455,105.283 ; v3(84.328,114.935) C28.1@85.725,114.935 ; C104.1@84.416,105.068 84.482,105.068 85.589,105.068 86.119,104.537 U12.121@86.152,104.537 ; U12.32@88.98,82.634 89.013,82.634 89.701,83.322 89.817,83.439 v3(90.17,83.439) 90.17,83.073 90.067,82.97 89.787,82.69 89.782,82.696 89.749,82.696 U12.33@89.334,82.281 ; v1(90.932,78.105) C108.1@91.575,78.105 ; C125.2@91.567,76.962 C108.1@91.567,77.978 ; U12.39@93.913,81.927 94.769,81.07 C101.1@94.769,80.872 ; C101.1@94.769,80.918 94.796,80.892 94.923,80.892 95.183,81.153 v1(95.25,81.153) ; v6(97.79,115.189) 97.819,115.16 97.819,113.879 R88.2@97.802,113.863 ; v7(100.203,84.963) 100.689,84.477 C115.1@100.943,84.477 ; U12.84@101.981,100.584 101.981,100.617 102.387,101.023 102.387,101.1 v1(102.434,101.147) ; U12.62@102.045,90.059 U12.62@102.077,90.059 ; v1@102.489,101.092 C100.1@102.87,101.473 ; v3@107.95,92.804 R89.2@107.95,94.336 ; v1(109.851,90.428) 109.904,90.428 110.026,90.551 C107.1@110.625,90.551 ; R99.2@110.299,87.566 110.371,87.566 R99.2@110.455,87.482 ; v12@110.455,83.855 v12(110.49,83.82) ; C107.1@110.617,90.559 110.617,91.686 C106.1@110.625,91.694 ; C106.1@110.625,91.817 C102.1@110.625,92.837 ; R91.1@112.903,119.424 114.985,117.342 114.985,116.663 v3(115.062,116.586) ; pad.7@135.509,127.254 135.509,128.373 C30.1@135.509,128.397 ; v3(136.525,132.334) v3@136.588,132.398 ; R90.1@138.171,132.398 R90.1@138.234,132.461
  Top Layer w0.27: v1(87.376,82.423) 87.376,82.434 88.273,83.331 U12.30@88.273,83.341 ; U12.95@97.802,104.184 U12.95@97.823,104.184 ; v7@99.161,105.522 v7(99.187,105.522)
  Top Layer w0.28: C109.1@86.841,81.761 86.841,81.828 87.376,82.363 v1(87.376,82.423)
  Top Layer w0.3: C111.1@74.426,95.754 C110.1@75.307,95.754 ; C110.1@75.315,95.754 C103.1@76.196,95.754 ; C103.1@76.2,95.758 76.2,96.45 76.581,96.831 v3(76.581,96.901) 77.525,96.901 U12.144@78.02,96.406 ; C109.1@86.868,81.788 87.63,81.026 88.011,81.026 U12.33@88.9,81.915 ; v8(93.116,110.629) 93.116,110.579 93.621,110.073 93.621,109.196 U12.108@93.206,108.78 ; U12.95@97.823,104.184 v7@99.161,105.522 ; U12.52@98.509,86.523 99.993,85.04 100.126,85.04 v7(100.203,84.963) ; v7(99.187,105.522) 99.264,105.599 99.264,105.868 100.699,107.303 100.699,107.454 C114.1@100.584,107.569 ; v2(99.568,128.524) 99.609,128.524 99.726,128.642 100.325,128.642 R21.2@100.335,128.651 ; v2(101.6,131.699) R20.2@102.375,131.699 ; v2(102.108,138.794) 102.116,138.802 102.745,138.802 R27.2@102.745,138.811 ; U12.72@105.58,93.594 106.266,92.908 106.37,92.804 107.95,92.804 v3(108.237,92.804) ; v2(107.569,142.03) v2@107.591,142.008 ; v3@108.323,92.89 109.047,92.89 C112.1@109.105,92.948 ; R26.2@108.563,142.008 R26.2@108.585,141.986 ; C112.1@109.486,92.837 C102.1@110.515,92.837 ; v12@110.455,83.855 R99.2@110.455,87.482 ; O1.1@111.76,112.667 112.055,112.372 112.055,111.973 112.676,111.352 112.938,111.352 C98.1@113.038,111.252 ; U9.20@113.166,126.295 113.166,125.975 TP16.1@113.792,125.349 ; TP16.1@113.849,125.306 113.849,125.21 113.975,125.085 113.975,124.496 C41.1@114.173,124.298 ; R100.2@114.242,87.684 114.296,87.63 v3(114.993,87.63) ; C41.1@114.3,124.323 114.4,124.223 114.4,124.073 114.425,124.048 114.575,124.048 114.625,123.998 116.386,123.998 116.418,124.03 v2(116.459,124.03) ; R23.2@117.729,130.556 117.815,130.642 118.283,130.642 118.323,130.683 v2(118.364,130.683) ; v2(118.872,127.101) 118.901,127.072 119.039,127.072 119.626,126.485 119.626,126.324 119.713,126.238 R22.2@119.8,126.238 ; v1(119.253,113.919) 119.253,113.903 C87.1@119.688,113.468 ; C71.1@119.888,80.645 121.92,80.645 122.301,81.026 U10.3@123.444,81.026 ; v2(121.285,102.235) 121.295,102.225 U11.40@121.295,99.364 ; R52.1@125.234,96.901 125.484,97.151 125.484,97.925 125.955,98.396 125.955,98.904 v2(125.984,98.933) ; R86.2@129.667,93.403 130.233,93.403 v2(130.302,93.472)
  Top Layer w0.35: C130_1.2@34.544,68.707 35.839,68.707 36.601,67.945 U19_1.6@37.039,67.945 ; C130_1.2@34.671,68.924 34.796,68.924 36.23,70.358 38.608,70.358 40.084,71.834 40.084,71.866 40.259,72.041 v7(40.259,72.136) ; C130_2.2@64.008,70.231 65.303,70.231 66.065,69.469 U19_2.6@66.503,69.469 ; C130_2.2@64.389,70.448 v3(64.389,71.755) ; 73.988,90.908 74.147,91.067 74.147,91.1 74.372,91.325 C116.1@74.422,91.325 ; U13.8@77.019,128.639 76.53,128.639 76.2,128.969 76.2,130.048 81.915,135.763 v4(83.312,135.763) v4@83.439,135.763 ; U19_3.6@96.545,69.977 U19_3.6@96.983,69.977 ; C130_4.2@123.825,70.739 125.12,70.739 125.882,69.977 U19_4.6@126.32,69.977 ; C130_4.2@124.206,70.956 v3(124.206,72.263) ; v3@136.588,132.398 R90.1@138.171,132.398
  Top Layer w0.4: U3.4@37.392,72.517 39.875,72.517 40.256,72.136 v7(40.259,72.136) ; U15.1@70.723,136.132 70.981,136.132 77.724,142.875 ; v7(73.152,91.059) 73.199,91.012 C116.1@74.092,91.012 ; 73.998,90.781 74.019,90.76 74.019,90.203 74.297,89.925 C10.1@74.422,89.925 ; C105.1@74.803,108.466 74.811,108.458 D5.1@76.581,108.458 ; C28.1@85.725,114.935 85.725,114.554 85.725,114.427 C27.1@86.36,113.792 ; v2(117.475,96.139) 117.864,96.528 C86.1@118.491,96.528 ; v3@120.523,80.01 120.523,80.518 ; v3(136.525,136.525) C32.1@137.783,136.525
  Top Layer w0.45: RT1.2@72.57,82.55 72.193,82.55 73.436,82.55 D2.2@74.5,83.615
  Top Layer w0.5: C2.1@47.371,92.329 48.446,92.329 48.573,92.456 v3(48.641,92.456) ; U1.3@51.308,94.824 U1.6@51.308,99.949 ; U20.3@56.052,145.161 57.286,145.161 59.523,142.924 59.543,142.924 59.563,142.904 C132.1@59.563,142.884 ; C132.1@59.563,142.875 77.724,142.875 82.804,142.875 83.312,142.367 v4(83.312,135.763) R97.2@83.312,130.542 ; U5.4@64.429,82.55 RT1.2@72.193,82.55 ; R85.2@74.803,106.239 74.089,106.953 74.089,107.267 v3(74.041,107.315) 74.041,107.382 74.803,108.144 C105.1@74.803,108.466 ; v3@79.375,83.439 C113.1@79.375,84.455 ; P1.1@82.907,114.741 83.338,114.31 83.508,114.31 84.085,114.887 84.28,114.887 v3(84.328,114.935) ; C130_3.2@94.869,70.739 94.927,70.681 95.43,70.681 96.134,69.977 U19_3.6@96.395,69.977 ; C130_3.2@94.869,70.956 v3(94.869,72.263) ; v2@107.591,142.008 R26.2@108.563,142.008 ; R25.2@113.665,140.335 v2(114.554,140.335) ; R24.2@115.57,135.255 v2(116.459,135.255) ; v2(124.714,90.297) D8.2@124.714,91.147 ; v3(136.525,132.334) 136.566,132.293 136.566,131.785 137.497,130.854 138.386,130.854 C25.2@138.684,130.556 ; v3(140.716,135.001) CD1.4@148.844,135.001 ; 149.49,80.634 152.4,77.724 U16.1@152.4,71.247
  Top Layer w0.55: U2.4@61.431,105.41 v3(63.119,105.41)
  Top Layer w0.6: U19_1.6@37.272,67.945 v3(39.751,67.945) U19_1.3@42.463,67.945 ; U19_1.3@42.875,67.945 43.688,67.945 44.069,68.326 C129_1.2@45.376,68.326 ; v3(45.339,70.104) 45.357,70.086 45.357,68.562 45.593,68.326 45.568,68.301 45.568,66.446 U17_1.3@45.593,66.421 ; U17_1.6@45.593,60.788 U17_1.3@45.593,66.212 ; U22.4@46.736,122.12 46.736,119.294 46.863,119.167 v3(46.863,119.126) ; D4.1@55.499,90.818 55.651,90.818 D4.1@55.809,90.661 ; 60.198,89.281 v4(61.976,91.059) ; U19_2.6@66.736,69.469 v3(69.215,69.469) U19_2.3@71.927,69.469 ; U19_2.3@72.339,69.469 73.152,69.469 73.533,69.85 C129_2.2@74.84,69.85 ; v3(74.803,71.628) 74.821,71.61 74.821,70.086 75.057,69.85 75.032,69.825 75.032,67.97 U17_2.3@75.057,67.945 ; U17_2.6@75.057,62.312 U17_2.3@75.057,67.736 ; U19_3.6@97.216,69.977 v3(99.695,69.977) U19_3.3@102.407,69.977 ; U19_3.3@102.819,69.977 103.632,69.977 104.013,70.358 C129_3.2@105.32,70.358 ; v3(105.283,72.136) 105.301,72.118 105.301,70.594 105.537,70.358 105.512,70.333 105.512,68.478 U17_3.3@105.537,68.453 ; U17_3.6@105.537,62.82 U17_3.3@105.537,68.244 ; v1(109.728,100.965) 110.65,100.965 110.937,100.678 R53.2@110.937,100.457 ; O1.1@111.76,112.522 111.76,115.117 112.185,115.542 112.185,115.728 113.043,116.586 v3(115.062,116.586) ; v2(112.141,105.283) 112.257,105.283 112.765,104.775 R64.1@112.881,104.775 ; v2(112.141,106.299) 112.168,106.326 112.776,106.326 R73.1@112.876,106.426 ; R73.1@112.776,106.426 v1(112.776,107.315) R60.2@112.776,108.077 ; C40.1@113.157,124.273 113.182,124.298 113.975,124.298 114.275,124.298 C41.1@114.3,124.323 ; v2(115.57,94.996) R59.2@115.57,96.266 ; C85.2@117.475,109.09 117.935,109.09 118.11,109.265 v3(118.11,110.49) ; v2(118.11,86.36) 118.11,87.011 R81.1@118.21,87.011 ; R81.1@118.441,87.161 R77.1@119.761,87.161 v2(119.761,86.36) ; v2(118.618,91.694) R74.1@118.618,92.622 ; v2(120.269,91.694) R76.1@120.269,92.622 ; v2(121.539,87.249) R84.1@121.539,88.177 ; R84.1@121.666,88.138 R83.1@123.063,88.138 ; v2(123.19,87.249) R83.1@123.19,88.177 ; R62.1@124.201,111.853 124.206,111.859 v1(124.206,112.649) ; v2(126.238,90.424) R51.1@126.238,91.352 ; U19_4.6@126.553,69.977 v3(129.032,69.977) U19_4.3@131.744,69.977 ; v2(129.413,101.981) 130.06,101.981 130.772,101.269 FB1.1@130.772,101.219 ; U19_4.3@132.156,69.977 132.969,69.977 133.35,70.358 C129_4.2@134.657,70.358 ; v3(134.62,72.136) 134.638,72.118 134.638,70.594 134.874,70.358 134.849,70.333 134.849,68.478 U17_4.3@134.874,68.453 ; U17_4.6@134.874,62.82 U17_4.3@134.874,68.244 ; v3(140.335,80.899) 149.203,80.899 149.479,80.623 R101.1@149.479,77.856
  Top Layer w0.65: U20.6@50.628,145.161 51.562,145.161 51.816,145.415 55.118,145.415 55.372,145.161 U20.3@56.052,145.161
  Top Layer w0.9: D4.1@55.499,90.805 57.023,89.281 60.198,89.281
  PWR Plane w0.254: v2(112.141,106.299) 112.738,106.896 112.738,107.277 v1(112.776,107.315)
  PWR Plane w0.3: 125.984,93.854 v2(125.984,98.933) ; v2(129.413,101.981) 129.413,98.786 129.286,98.659 129.286,95.504 130.302,94.488 v2(130.302,93.472)
  PWR Plane w0.35: v3@48.768,92.583 49.657,93.472 49.657,94.615 v5(51.308,96.266)
  PWR Plane w0.4: v5(51.308,96.266) 58.627,88.947 58.881,88.947 ; 103.886,97.663 107.95,97.663 109.728,99.441 v1@109.728,100.938
  PWR Plane w0.5: 61.849,110.49 61.849,113.538 ; 103.759,93.345 106.461,93.345 106.602,93.205 106.862,93.205 107.214,92.852 108.189,92.852 v3(108.237,92.804) ; 105.743,105.791 111.633,105.791 ; v2@112.141,106.172 111.926,106.172 111.633,105.879 111.633,105.791 ; v2(112.141,106.299) v2(112.141,105.283) 111.633,105.791 ; v3@118.11,110.617 118.11,113.157 118.872,113.919 v1(119.253,113.919) v1@119.126,114.046 ; v10(120.777,109.093) 120.777,109.22 v1(124.206,112.649) 124.206,113.411 122.936,114.681 ; 122.764,118.428 122.789,118.402 122.936,118.256 ; 124.079,124.587 124.079,127.127 124.333,127.381
  PWR Plane w0.6: v3(46.736,120.269) 46.736,119.253 52.324,113.665 61.722,113.665 61.849,113.538 ; v3(115.062,116.586) 115.103,116.586 115.891,117.374 115.977,117.374
  Bottom Layer w0.3: v2(99.568,128.524) 100.254,128.524 100.517,128.787 100.517,130.667 101.019,131.169 101.474,131.624 101.484,131.624 101.559,131.699 v2(101.6,131.699) 101.6,131.74 101.782,131.922 101.782,134.599 101.533,134.848 101.533,137.813 101.727,138.007 101.727,138.389 102.108,138.77 v2(102.108,138.794)
  Bottom Layer w0.5: v2@113.228,137.541 113.228,137.739 v2(113.792,138.303) 115.443,138.303 115.784,137.962 115.784,135.803 v2@116.459,135.128 ; v2(113.403,137.541) 113.403,135.644 118.859,130.188 v2@118.859,127.14 ; v2(116.459,124.03) 116.889,124.46 v2(118.237,124.46) 118.491,124.714 118.491,126.72 v2(118.872,127.101) ; v10@120.777,109.047 120.758,109.047 120.737,109.026 120.737,102.783 124.587,98.933 v2(125.984,98.933)
  other v3: 41.021,67.945 44.196,70.104 110.804,81.788 74.803,82.55 79.375,83.312 143.637,135.001
  other v4: 66.294,91.059 64.008,91.821 130.175,137.541 83.312,142.24
  other v5: 58.928,79.629 60.833,79.629 62.738,79.629 64.643,79.629 66.548,79.629 70.358,84.201 70.358,85.852
  other v6: 78.613,76.581
Temp1: C8.1 D2.1 R6.2 RT1.1 U12.27 | length 11.8
  Top Layer w0.254: C8.1@76.835,80.772 77.851,80.772 80.01,82.931 85.709,82.931 U12.27@87.133,84.355
TXM1: R58.1 T1.3 U11.3 | length 14.7
  Top Layer w0.2: U11.3@126.706,101.755 127.607,101.755 129.41,99.952 130.553,99.952 R58.1@130.937,99.568
  Top Layer w0.25: R58.1@131.318,99.225 131.995,98.548 131.995,96.478 135.763,92.71 T1.3@136.906,92.71
  Top Layer w0.3: R58.1@131.318,99.225 R58.1@131.318,99.275
TXM2: R72.1 T2.3 U11.11 | length 19.5
  Top Layer w0.2: R72.1@129.032,108.624 R72.1@129.332,108.924
  Top Layer w0.25: U11.11@127.341,105.755 127.975,105.755 128.986,106.766 R72.1@128.986,108.274 ; R72.1@129.332,108.924 129.332,109.139 129.921,109.728 129.921,111.887 130.81,112.776 130.81,114.173 136.907,120.27 137.605,120.27 T2.3@137.858,120.523
TXP1: R55.1 T1.1 U11.4 | length 16.1
  Top Layer w0.2: R55.1@132.885,99.516 R55.1@133.096,99.304
  Top Layer w0.25: U11.4@126.706,102.255 127.996,102.255 129.892,100.359 131.67,100.359 132.513,99.516 R55.1@132.885,99.516 ; R55.1@132.887,99.016 132.419,98.548 132.419,96.689 133.858,95.25 T1.1@137.477,95.25
  Top Layer w0.3: R55.1@132.887,99.016 133.096,99.225 R55.1@133.096,99.275
TXP2: R71.1 T2.1 U11.12 | length 22.2
  Top Layer w0.2: T2.1@137.802,123.007 T2.1@137.858,123.063
  Top Layer w0.25: U11.12@126.706,106.255 127.337,106.255 127.635,106.553 R71.1@127.635,108.37 ; R71.1@127.381,108.674 128.27,109.563 128.27,111.252 130.219,113.201 130.219,116.376 136.85,123.007 T2.1@137.802,123.007
USB_5V: D7.1 J10.1
USB_D+: R96.2 U12.104 | length 27.5
  Top Layer w0.254: U12.104@94.62,107.366 95.458,108.204 v2(97.155,108.204) ; v1(114.173,119.761) R96.2@115.189,120.777
  Bottom Layer w0.254: v2(97.155,108.204) 98.679,109.728 106.426,109.728 109.093,112.395 109.093,114.681 v1(114.173,119.761)
USB_D-: R95.2 U12.103 | length 27.1
  Top Layer w0.254: U12.103@94.973,107.012 95.006,107.012 95.56,107.567 v2(97.282,107.567) ; v1(115.316,118.745) 115.839,119.268 R95.2@116.22,119.268
  Bottom Layer w0.254: v2@97.282,107.442 98.859,109.019 98.933,109.093 103.875,109.122 cw(c103.886,107.315) 103.905,109.122 106.724,109.093 106.934,109.093 107.008,109.167 109.728,111.887 109.728,113.157 v1(115.316,118.745)
VDDA3.3V_CLEAN: C79.2 C80.1 C88.2 C89.2 C90.2 C93.2 FB1.2 T1.2 T1.7 T2.2 T2.7 U11.5 | length 84.9
  Top Layer w0.3: U11.5@127.381,102.743 C80.1@130.818,102.743
  Top Layer w0.45: C90.2@123.952,115.316 123.952,115.198 124.078,115.072 124.332,115.072 124.342,115.062 127.39,115.062 127.768,115.44 129.537,115.44 v1(129.54,115.443) 129.54,116.84 129.794,117.094 v1(129.794,117.983) ; C89.2@128.27,86.868 129.537,86.868 v2(129.54,86.865) ; C88.2@128.648,91.44 128.768,91.56 129.025,91.56 ; v2@129.54,86.868 129.54,91.31 v2(129.54,92.075) ; C80.1@130.818,102.743 132.067,101.494 132.147,101.494 132.207,101.434 FB1.2@132.207,101.346 ; FB1.2@132.372,101.219 132.597,100.994 132.597,100.462 132.715,100.344 v1(132.715,100.33) ; v1(132.969,118.11) 133.477,118.11 137.005,121.638 137.703,121.638 T2.2@137.858,121.793 ; v1(133.739,115.443) T2.7@137.16,115.443 ; v2(136.017,88.138) 136.37,87.785 137.322,87.785 T1.7@137.477,87.63 ; v2(136.017,93.98) T1.2@136.779,93.98
  Top Layer w0.5: C88.2@128.143,91.31 129.41,91.31 ; 129.025,91.56 v2(129.54,92.075)
  Top Layer w0.6: FB1.2@132.372,101.219 C79.2@133.858,101.219
  PWR Plane w0.45: v1(129.54,115.443) v1(133.739,115.443) ; v1(129.794,117.983) 129.921,118.11 v1(132.969,118.11)
  PWR Plane w0.5: v1(129.667,102.743) 130.683,102.743 ; v1(132.715,100.33) 132.588,100.457 132.588,101.727 134.747,103.886 134.747,114.435 v1(133.739,115.443)
  Bottom Layer w0.45: v2@129.532,86.86 130.81,88.138 v2(136.017,88.138) ; v2(129.54,92.075) 131.064,92.075 132.969,93.98 v2(136.017,93.98) 134.493,95.504 134.493,99.06 133.223,100.33 v1(132.715,100.33)
VGND1_1: Q1_1.3 R102_1.2 TPL1_1.1 U17_1.8
VGND1_2: Q1_2.3 R102_2.2 TPL1_2.1 U17_2.8
VGND1_3: Q1_3.3 R102_3.2 TPL1_3.1 U17_3.8
VGND1_4: Q1_4.3 R102_4.2 TPL1_4.1 U17_4.8
VGND2_1: Q2_1.3 R104_1.2 TPL2_1.1 U19_1.8
VGND2_2: Q2_2.3 R104_2.2 TPL2_2.1 U19_2.8
VGND2_3: Q2_3.3 R104_3.2 TPL2_3.1 U19_3.8
VGND2_4: Q2_4.3 R104_4.2 TPL2_4.1 U19_4.8
VM5V: U2.1 U2.2 U12.22 | length 36.7
  Top Layer w0.254: v1(80.373,86.973) 80.413,86.973 82.55,84.836 84.185,84.836 84.909,85.56 84.909,85.602 85.396,86.089 U12.22@85.396,86.121
  Top Layer w0.4: U2.1@61.414,101.6 61.514,101.6 61.414,101.7 U2.2@61.414,102.87 ; U2.1@61.464,101.6 71.882,101.6 74.228,99.254 v3(74.228,99.187)
  Bottom Layer w0.254: v3(74.228,99.187) 74.168,99.127 74.168,92.837 80.01,86.995 80.352,86.995 v1(80.373,86.973)
VM24V: U3.1 U3.2 U12.28 | length 55
  Top Layer w0.254: 38.1,77.47 75.311,77.47 80.137,82.296 85.781,82.296 87.533,84.048 U12.28@87.566,84.048
  Top Layer w0.3: U3.2@37.338,74.93 37.338,76.327 37.338,76.835 37.973,77.47
pads on no net: CD1.1 CD1.8 CD1.10 J1.4 J1.7 J1.22 J2.3 J2.4 J3.3 J3.4 J6.5 J6.8 J6.11 J6.23 J7.4 J7.5 J8.4 J8.5 J9.5 J9.6 J9.8 J9.9 J9.18 J9.21 J9.M1 J9.M2 J10. J10.6 J10.7 J10.8 J10.9 J11.3 J11.4 O1.5 P1.7 T1.4 T1.5 T1.12 T1.13 T2.4 T2.5 T2.12 T2.13 U1.4 U2.5 U2.6 U2.7 U3.5 U3.6 U3.7 U9.11 U9.12 U9.13 U9.18 U9.19 U9.23 U9.24 U9.25 U9.38 U10.5 U10.8 U11.13 U11.15 U11.24 U11.27 U11.30 U11.33 U11.34 U11.48 U12.1 U12.2 U12.3 U12.9 U12.10 U12.11 U12.12 U12.13 U12.23 U12.24 U12.47 U12.49 U12.50 U12.56 U12.57 U12.77 U12.78 U12.79 U12.80 U12.81 U12.82 U12.86 U12.87 U12.88 U12.89 U12.90 U12.91 U12.92 U12.93 U12.96 U12.98 U12.99 U12.100 U12.101 U12.114 U12.115 U12.123 U12.124 U12.129 U12.132 U12.134 U12.143 U13.2 U13.3 U13.4 U13.5 U13.6 U13.7 U13.14 U13.15 U13.16 U13.17 U13.19 U13.21 U13.22 U13.25 U14.6 U15.2 U15.7 U15.8 U15.10 U15.MH1 U15.MH2 U15.MH3 U15.MH4 U16.2 U16.5 U16.MH1 U16.MH2 U17_1.4 U17_2.4 U17_3.4 U17_4.4 U19_1.4 U19_2.4 U19_3.4 U19_4.4 U20.4 U21.3 U21.7 U22.5 U22.6 U22.7 XF1.MH1
copper on no net:
  other v11: 160.02,48.641 47.625,72.517 124.587,120.904 140.081,127.381
  other v16: 54,152

## Polygon pours and split planes (outlines as drawn)
NetD13_4_1 on Top Layer "NETD13_4_1_L01_P607" (solid, remove dead copper, pour order 607): 144.399,68.961 147.066,68.961 147.701,68.326 147.701,66.802 149.098,65.405 149.098,61.722 147.447,61.722 145.542,63.627 145.542,66.421 144.272,67.691 143.637,68.326 143.637,70.866 144.399,70.866
NetD13_2_1 on Top Layer "NETD13_2_1_L01_P604" (solid, remove dead copper, pour order 604): 84.582,68.453 87.249,68.453 87.884,67.818 87.884,66.294 89.281,64.897 89.281,61.214 87.63,61.214 85.852,62.992 85.852,65.786 84.455,67.183 83.82,67.818 83.82,70.358 84.582,70.358
GND on Top Layer "GND_L01_P759" (solid, remove dead copper, pour order 759): 33.782,48.45 34.29,48.959 37.084,48.959 37.592,48.45 37.592,45.783 37.211,45.402 34.29,45.402 33.782,45.91
24Vin on Top Layer "24VIN_L01_P648" (solid, remove dead copper, pour order 648): 34.163,37.714 34.163,43.307 150.114,43.307 150.114,37.857
GND on Top Layer "GND_L01_P758" (solid, remove dead copper, pour order 758): 152.273,44.196 152.273,42.545 152.654,42.164 157.734,42.164 157.988,42.418 157.988,44.323 157.607,44.704 152.654,44.704
5V on Top Layer "5V_L01_P741" (solid, remove dead copper, pour order 741): 107.759,127.572 107.505,127.317 107.505,126.365 107.95,126.365 108.394,126.809 108.394,127.572
"GSE PWR" on Top Layer "GSE_PWR_L01_P659" (solid, pour order 659): 17 vertices, not listed, extent 30.472,137.287 53.467,155.956
NetC5_1 on Top Layer "NETC5_1_L01_P742" (solid, remove dead copper, pour order 742): 33.401,105.029 33.02,104.648 33.02,101.346 33.274,101.092 36.703,101.092 37.592,100.203 37.592,99.06 37.846,98.806 42.418,98.806 42.418,104.521 41.91,105.029 41.783,105.029
VGND2_2 on Top Layer "VGND2_2_L01_P540" (solid, remove dead copper, pour order 540): 65.786,67.31 67.31,67.31 67.691,66.929 67.691,61.341 67.183,60.833 61.341,60.833 61.341,63.754 61.595,64.008 65.786,64.008
NetC5_1 on Top Layer "NETC5_1_L01_P701" (solid, remove dead copper, pour order 701): 44.069,98.679 44.069,105.283 44.958,106.172 49.657,106.172 52.451,108.966 52.451,111.887 51.181,113.157 45.847,113.157 42.672,109.982 37.719,105.029 37.719,98.679
NetD13_2 on Top Layer "NETD13_2_L01_P657" (solid, pour order 657): 60.452,133.35 62.23,133.35 66.675,128.905 66.675,123.19 66.929,122.936 66.929,121.666 63.754,121.666 63.627,121.793 63.627,127 60.452,130.175
STM32VDD on Top Layer "STM32VDD_L01_P740" (solid, remove dead copper, pour order 740): 70.866,81.915 74.803,81.915 75.311,82.423 75.311,84.328 74.93,84.709 70.993,84.709 70.866,84.582
NetQ3_5 on Top Layer "NETQ3_5_L01_P739" (solid, remove dead copper, pour order 739): 62.357,121.158 68.961,121.158 69.469,120.65 69.469,112.522 68.58,111.633 62.23,111.633 59.817,114.046 57.531,114.046 54.483,117.094 54.483,118.237 61.087,118.237 62.23,119.38 62.357,119.38
NetC13_2 on Top Layer "NETC13_2_L01_P512" (solid, remove dead copper, pour order 512): 29.21,85.852 29.21,83.947 32.131,81.026 40.894,81.026 45.085,85.217 45.085,85.852
GND on Top Layer "GND_L01_P735" (solid, remove dead copper, pour order 735): 46.99,89.154 44.831,86.995 44.831,86.614 47.244,86.614 47.371,86.741 47.371,89.154
GND on Top Layer "GND_L01_P734" (solid, remove dead copper, pour order 734): 45.847,86.36 46.228,85.979 47.371,85.979 47.879,86.487 47.879,91.313 46.101,91.313 45.847,91.059
24Vin on Top Layer "24VIN_L01_P732" (solid, remove dead copper, pour order 732): 34.671,76.2 35.56,76.2 36.068,76.708 36.068,78.232 35.052,79.248 30.099,79.248 28.448,77.597 28.448,51.435 31.75,51.435 31.75,73.279 32.893,74.422
GND on Top Layer "GND_L01_P559" (solid, remove dead copper, pour order 559): 32.766,68.453 33.274,68.453 33.782,67.945 35.306,67.945 35.306,63.627 32.258,63.627 32.258,66.929 32.258,67.945
24Vin on Top Layer "24VIN_L01_P730" (solid, remove dead copper, pour order 730): 28.448,55.245 28.448,42.037 32.766,37.719 37.211,37.719 37.211,40.767 31.877,46.101 31.877,55.245